# Altium PCB Joystick Board.PcbDoc
Units mm, origin at the board's own origin, x right, y up, seen from the top; angles counter-clockwise.
Board outline 69 x 52 mm, 2 copper layers (Top Layer, Bottom Layer); 7 components, 39 nets, 36 pads, 0 vias.
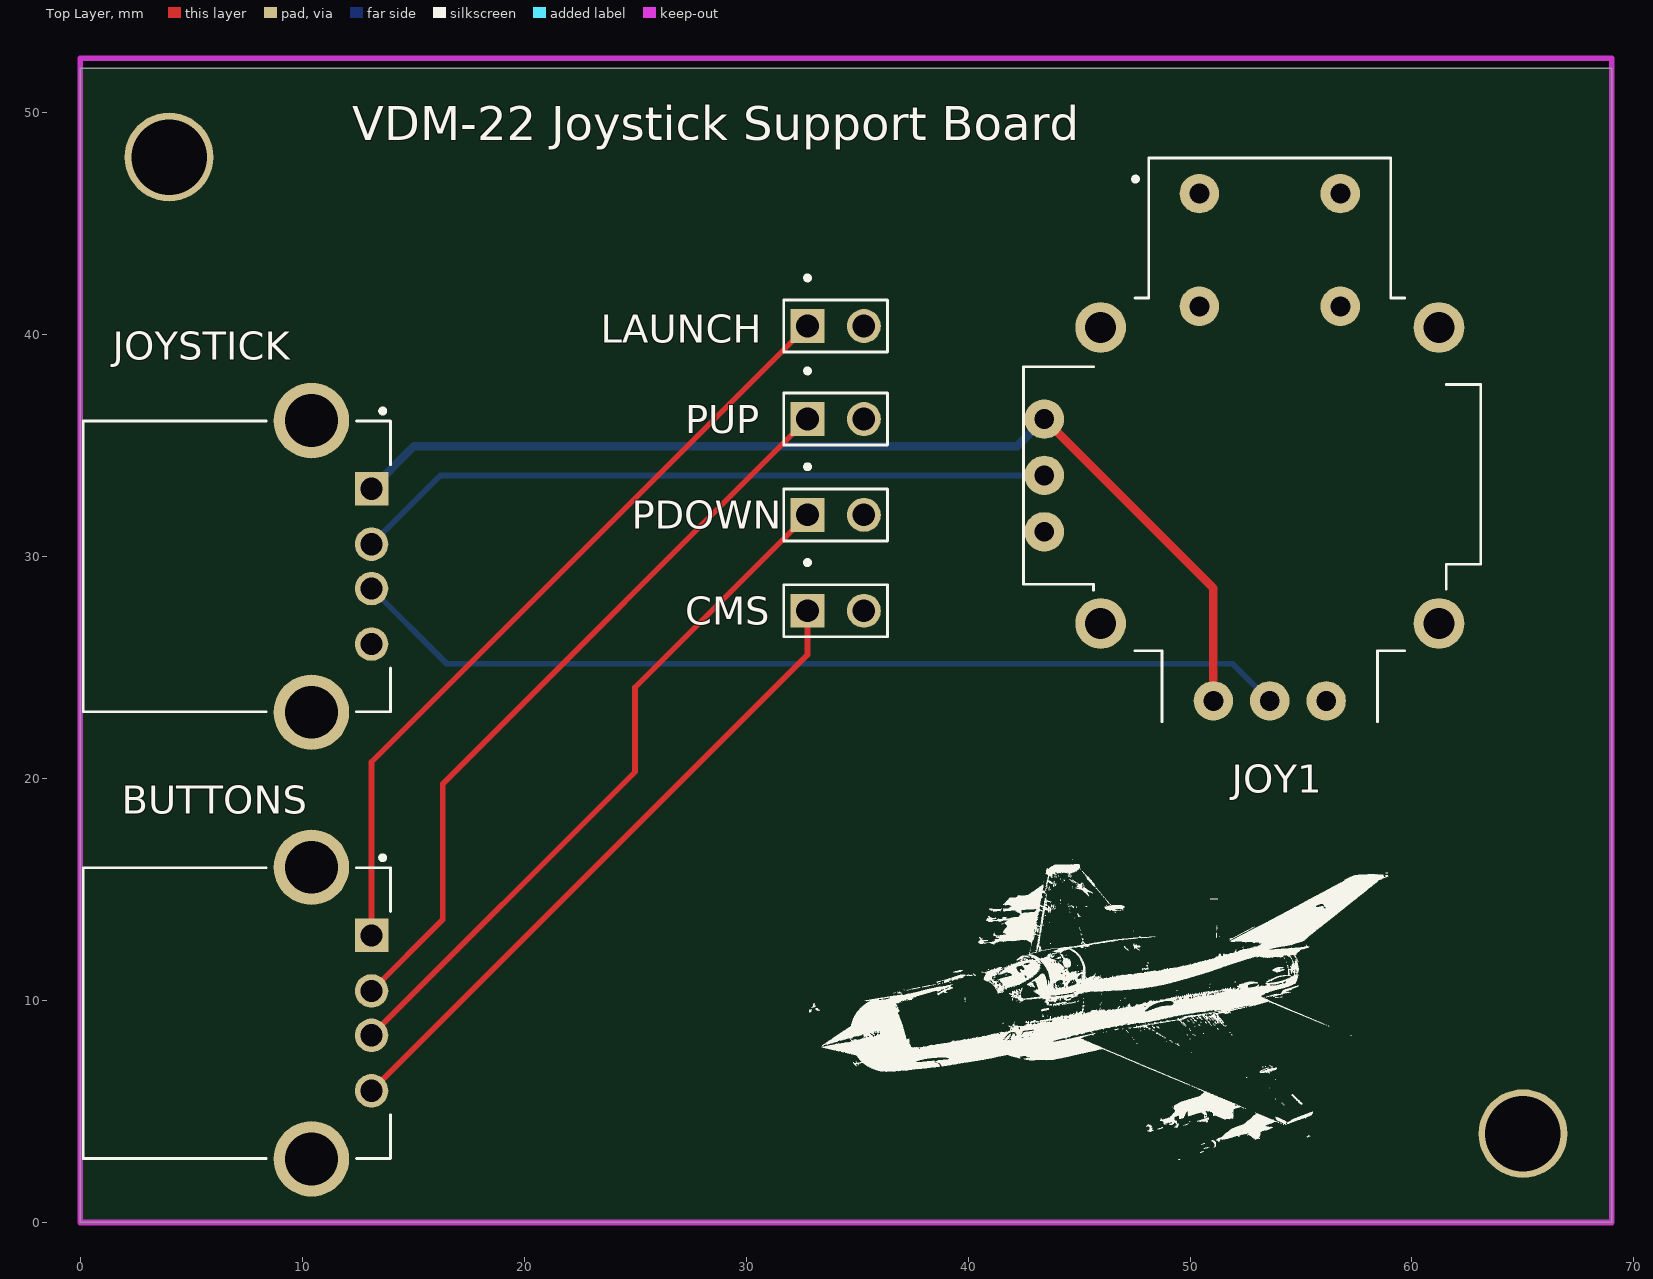
[diagram p0: Top Layer view]
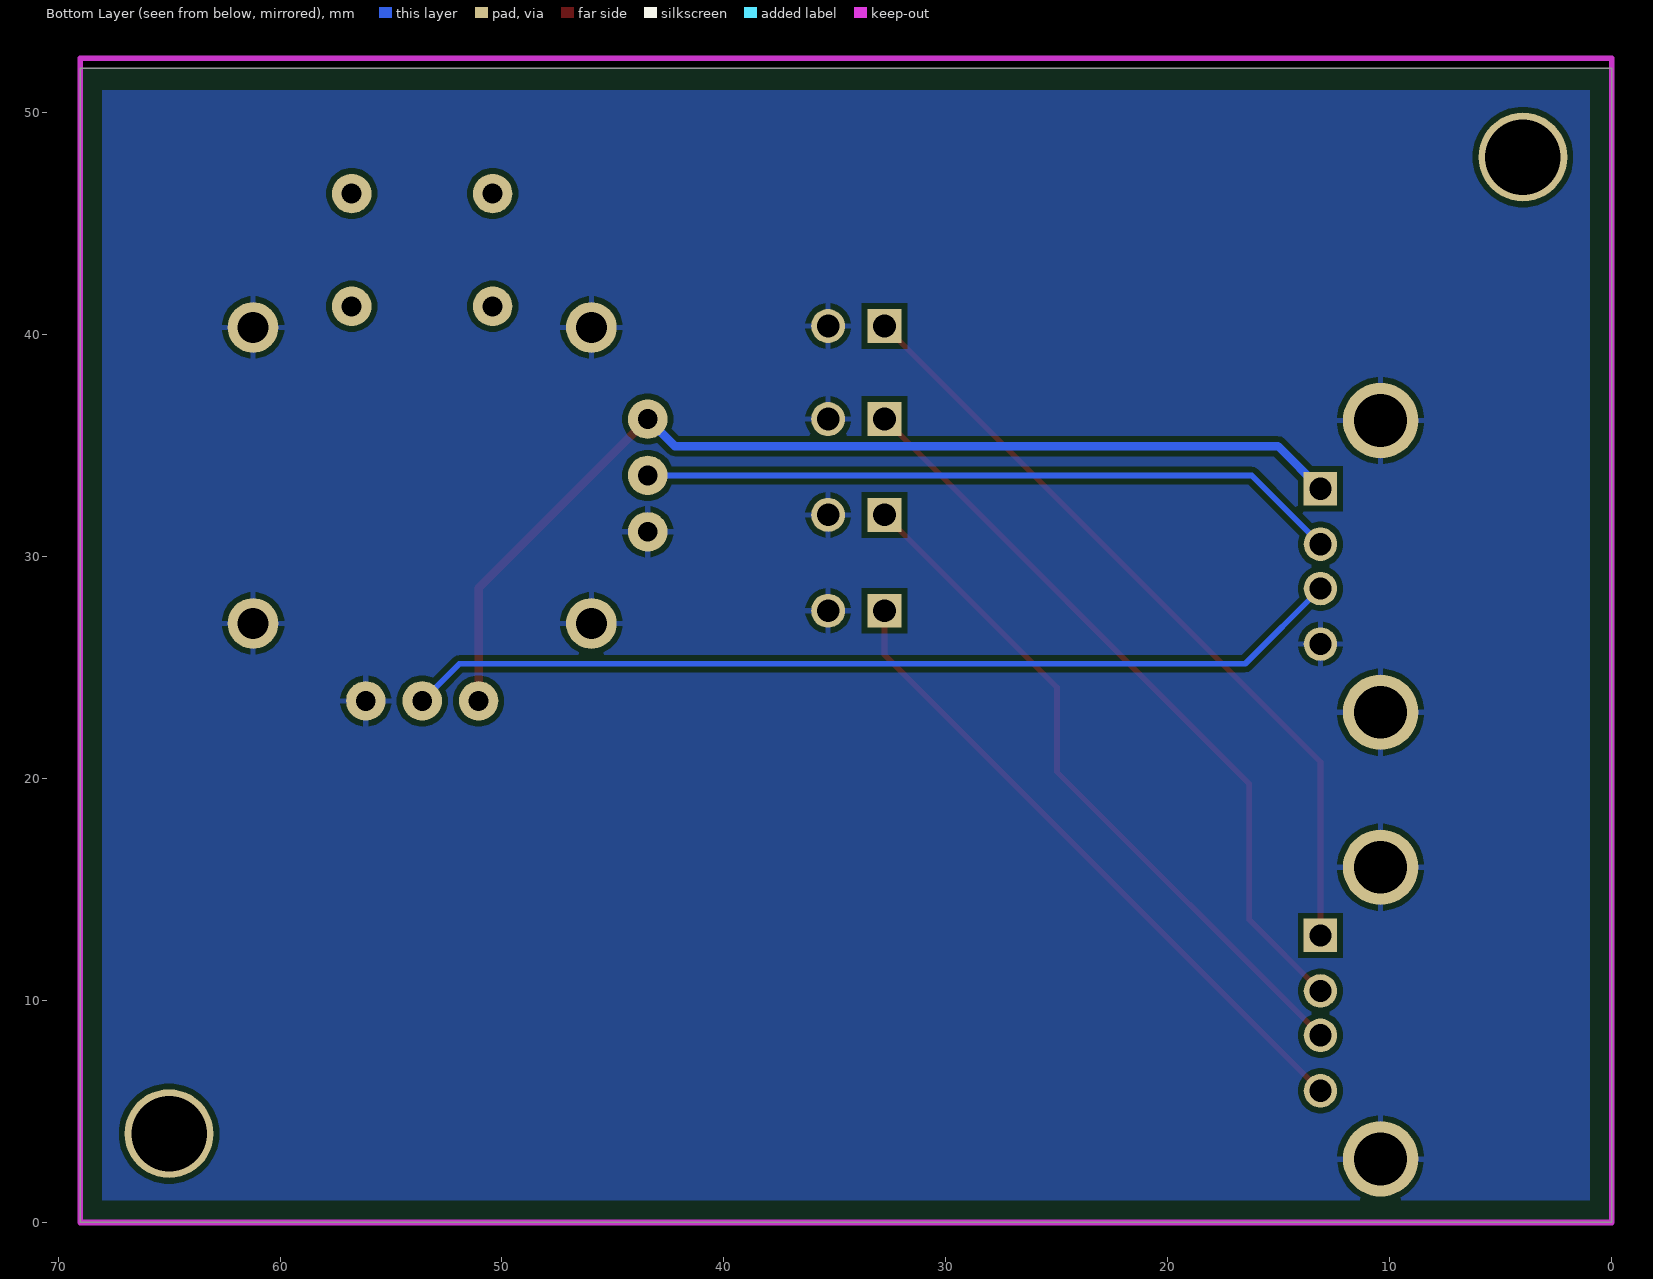
[diagram p1: Bottom Layer view, seen from below]

## Layer stack, top to bottom
Top Solder: solder mask 0.0102, Solder Resist, Dk 3.5
Top Layer: signal copper 0.0356
Dielectric 1: dielectric 0.32, FR-4, Dk 4.8
Bottom Layer: signal copper 0.0356
Bottom Solder: solder mask 0.0102, Solder Resist, Dk 3.5

## Board outline
0,0 69,0 69,52 0,52

## Design rules (kind name [scope] priority, off if disabled: settings)
Clearance [All] p1: gap=0.254 ignorepadtopadclearanceinfootprint=FALSE except(0: Arc-Hole Track-Hole SMDPad-Hole THPad-Hole Via-Hole Fill-Hole Poly-Hole Region-Hole Text-Hole)
PolygonConnect [All] p1: connectstyle=Relief reliefconductorwidth=0.254 reliefentries=4 polygonreliefangle="90 Angle" airgapwidth=0.254
RoomDefinition "Joystick Board" [InComponentClass('Joystick Board')] p1: confinementstyle=ConfineIn formatcopy=TRUE lockcomponents=TRUE outline -0.762,-0.508 69.977,-0.508 69.977,53.086 -0.762,53.086
RoutingVias [All] p1: holewidth=0.711 width=1.27 viastyle="Through Hole" minholewidth=0.711 minwidth=1.27 maxholewidth=0.711 maxwidth=1.27
SolderMaskExpansion [All] p1: expansion=0.102 istentingtop=FALSE
Width "Schematic Width Constraint_5" [InNet('OUTB')] p1: maxlimit=0.508 minlimit=0.254 preferedwidth=0.508 minimp=50.000000 maximp=50.000000 favimp=50.000000
Width "Schematic Width Constraint_4" [InNet('OUTA')] p2: maxlimit=0.508 minlimit=0.254 preferedwidth=0.508 minimp=50.000000 maximp=50.000000 favimp=50.000000
Width "Schematic Width Constraint_3" [InNet('+12')] p3: maxlimit=0.381 minlimit=0.381 preferedwidth=0.381 minimp=50.000000 maximp=50.000000 favimp=50.000000
Width "Schematic Width Constraint_2" [InNet('+5')] p4: maxlimit=0.381 minlimit=0.381 preferedwidth=0.381 minimp=50.000000 maximp=50.000000 favimp=50.000000
Width "Schematic Width Constraint_1" [InNet('NetR1_1')] p5: maxlimit=0.508 minlimit=0.254 preferedwidth=0.254 minimp=50.000000 maximp=50.000000 favimp=50.000000
Width "Schematic Width Constraint" [InNet('NetR2_1')] p6: maxlimit=0.508 minlimit=0.254 preferedwidth=0.254 minimp=50.000000 maximp=50.000000 favimp=50.000000
Width [All] p7: maxlimit=0.254 minlimit=0.254 preferedwidth=0.254
30 further rules are at their usual default settings.

## Components (designator, comment, footprint, x,y, rotation, side; value= is the part's Value field where it differs from the comment)
BUTTONS "UE27AC54100" AMPHENOL_UE27AC54100 13.124,9.432 r270 top
CMS "5-146281-2" TE_5-146281-2 34.036,27.559 r0 top
JOY1 "COM-09032" XDCR_COM-09032 53.594,33.655 r0 top
JOYSTICK "UE27AC54100" AMPHENOL_UE27AC54100 13.124,29.557 r270 top
LAUNCH "5-146281-2" TE_5-146281-2 34.036,40.386 r0 top
PDOWN "5-146281-2" TE_5-146281-2 34.036,31.877 r0 top
PUP "5-146281-2" TE_5-146281-2 34.036,36.195 r0 top

## Footprints (in the part's own frame and the unit in brackets; to place one, negate y for a bottom-side part, rotate by r counter-clockwise, add the part's x,y. Pads: shape width x height; smd on the part's side, far side on the other; paste and mask are expansions set on the pad)
AMPHENOL_UE27AC54100 [mm]
  rect 1.508x1.508 hole 1: 1(-3.5,0)
  round 1.508 hole 1: 2(-1,0) 3(1,0) 4(3.5,0)
  round 3.396 hole 2.38: S1(-6.57,-2.71) S2(6.57,-2.71)
  silkscreen extent -7.1,-12.99 6.55,0.86
TE_5-146281-2 [mm]
  rect 1.53x1.53 hole 1.02: 1(-1.27,0)
  round 1.53 hole 1.02: 2(1.27,0)
  silkscreen extent -2.34,-1.17 2.34,2.27
XDCR_COM-09032 [mil]
  round 70 hole 35.43: B1A(-125,500) B1B(125,500) B2A(-125,300) B2B(125,300)
  round 70 hole 35: H1(-100,-400) H2(0,-400) H3(100,-400) V1(-400,100) V2(-400,0) V3(-400,-100)
  round 90 hole 55: S1(-300,262.5) S2(-300,-262.5) S3(300,-262.5) S4(300,262.5)
  silkscreen extent -437,-437 374,563

## Part data
BUTTONS JOYSTICK: "USB-A _USB TYPE-A_ USB 2.0 Receptacle Connector 4 Position Through Hole, Right Angle", Package=None, Digi-Key_Part_Number=UE27AC54100-ND, Digi-Key_Purchase_URL=https://www.digikey.com/product-detail/en/amphenol-icc-commercial-products/UE27AC54100/UE27AC54100-ND/1972253?utm_source=snapeda&utm_medium=aggregator&utm_campaign=symbol, MF="Amphenol ICC _Commercial Products_", MP=UE27AC54100, SnapEDA_Link=https://www.snapeda.com/parts/UE27AC54100/Amphenol%20Commercial%20Products/view-part/4701388/?ref=snap
CMS LAUNCH PDOWN PUP: "Header; Breakaway; 0.100 in.; PC Board; Single; 2; 0.025 in.; 0.12 in.; 3 A", Package=None, Availability=Unavailable, Centerline_Pitch="2.54 mm[.1 in]", EU_RoHS_Compliance=Compliant, MF="TE Connectivity", MP=5-146281-2, Number_of_Positions=2, Price=None, Product_Type=Connector, SnapEDA_Link=https://www.snapeda.com/parts/5-146281-2/TE%20Connectivity%20AMP%20Connectors/view-part/457165/?ref=snap
JOY1: "Thumb Joystick", Package=None, Availability=Unavailable, MP=COM-09032, Price=None

## Free pads (board coordinates)
  round 4 hole 3.4: 7(4,48) 7(65,4)

## Nets (pads, with @x,y where several pads share a name; then routed paths per layer and width w, separated by ;. In a path a pad name is that pad's centre, name@x,y a point inside that pad or via, vN(x,y) a via of type N, cw(c..) or ccw(c..) an arc to the next point about the centre after c; other vN are vias at no path point)
+5: JOY1.H1 JOY1.V1 JOYSTICK.1 | length 47.5
  Top Layer w0.381: JOY1.V1 51.054,28.575 JOY1.H1
  Bottom Layer w0.381: JOYSTICK.1 15.043,34.976 42.215,34.976 JOY1.V1
+12: 
AGND: 
BEEPER: 
CMS: BUTTONS.4 CMS.1 | length 29.8
  Top Layer w0.254: BUTTONS.4 32.766,25.574 CMS.1
DB0: 
DB1: 
DB2: 
DB3: 
DB4: 
DB5: 
DB6: 
DB7: 
GND: BUTTONS.S1 BUTTONS.S2 CMS.2 JOY1.H3 JOY1.S1 JOY1.S2 JOY1.S3 JOY1.S4 JOY1.V3 JOYSTICK.4 JOYSTICK.S1 JOYSTICK.S2 LAUNCH.2 PDOWN.2 PUP.2
Launch: BUTTONS.1 LAUNCH.1 | length 35.6
  Top Layer w0.254: BUTTONS.1 13.124,20.744 LAUNCH.1
nAB: 
NetC8_1: 
NetC9_1: 
NetJ5_1: 
NetJ5_2: 
NetJ5_3: 
NetJ5_4: 
NetJ6_1: 
NetJ6_2: 
NetLS_P: 
NetR1_1: 
NetR2_1: 
nLDAC: 
nRST: 
nWR: 
OUTA: 
OUTB: 
PDOWN: BUTTONS.3 PDOWN.1 | length 31.6
  Top Layer w0.254: BUTTONS.3 24.994,20.302 24.994,24.105 PDOWN.1
pLAUNCH: 
PUP: BUTTONS.2 PUP.1 | length 33.9
  Top Layer w0.254: BUTTONS.2 16.332,13.64 16.332,19.761 PUP.1
RXRWRF: 
STICKX: JOY1.H2 JOYSTICK.3 | length 42.6
  Bottom Layer w0.254: JOYSTICK.3 16.51,25.171 51.918,25.171 JOY1.H2
STICKY: JOY1.V2 JOYSTICK.2 | length 31.6
  Bottom Layer w0.254: JOYSTICK.2 16.222,33.655 JOY1.V2
TXRWRR: 
pads on no net: JOY1.B1A JOY1.B1B JOY1.B2A JOY1.B2B

## Polygon pours and split planes (outlines as drawn)
GND on Bottom Layer "GND_L02_P000" (solid, pour order 0): 1,51 1,1 68,1 68,51

## Keep-outs
Keep-Out Layer:
  lines w0.254: 0,0 69,0 69,52.451 0,52.451 0,0

## Silkscreen, mask and mechanical layers (free items; w line width, h text height)
Top Overlay:
  drawing of 647 lines, arcs and shapes, not listed
  text "VDM-22 Joystick Support Board" at 12.254,48.762 h1.52